# Altium PCB PiRA-RTC-HAT-PCB.PcbDoc
Units mm, origin at the board's own origin, x right, y up, seen from the top; angles counter-clockwise.
Board outline 65 x 30 mm, 2 copper layers (Top Layer, Bottom Layer); 77 components, 59 nets, 308 pads, 91 vias.
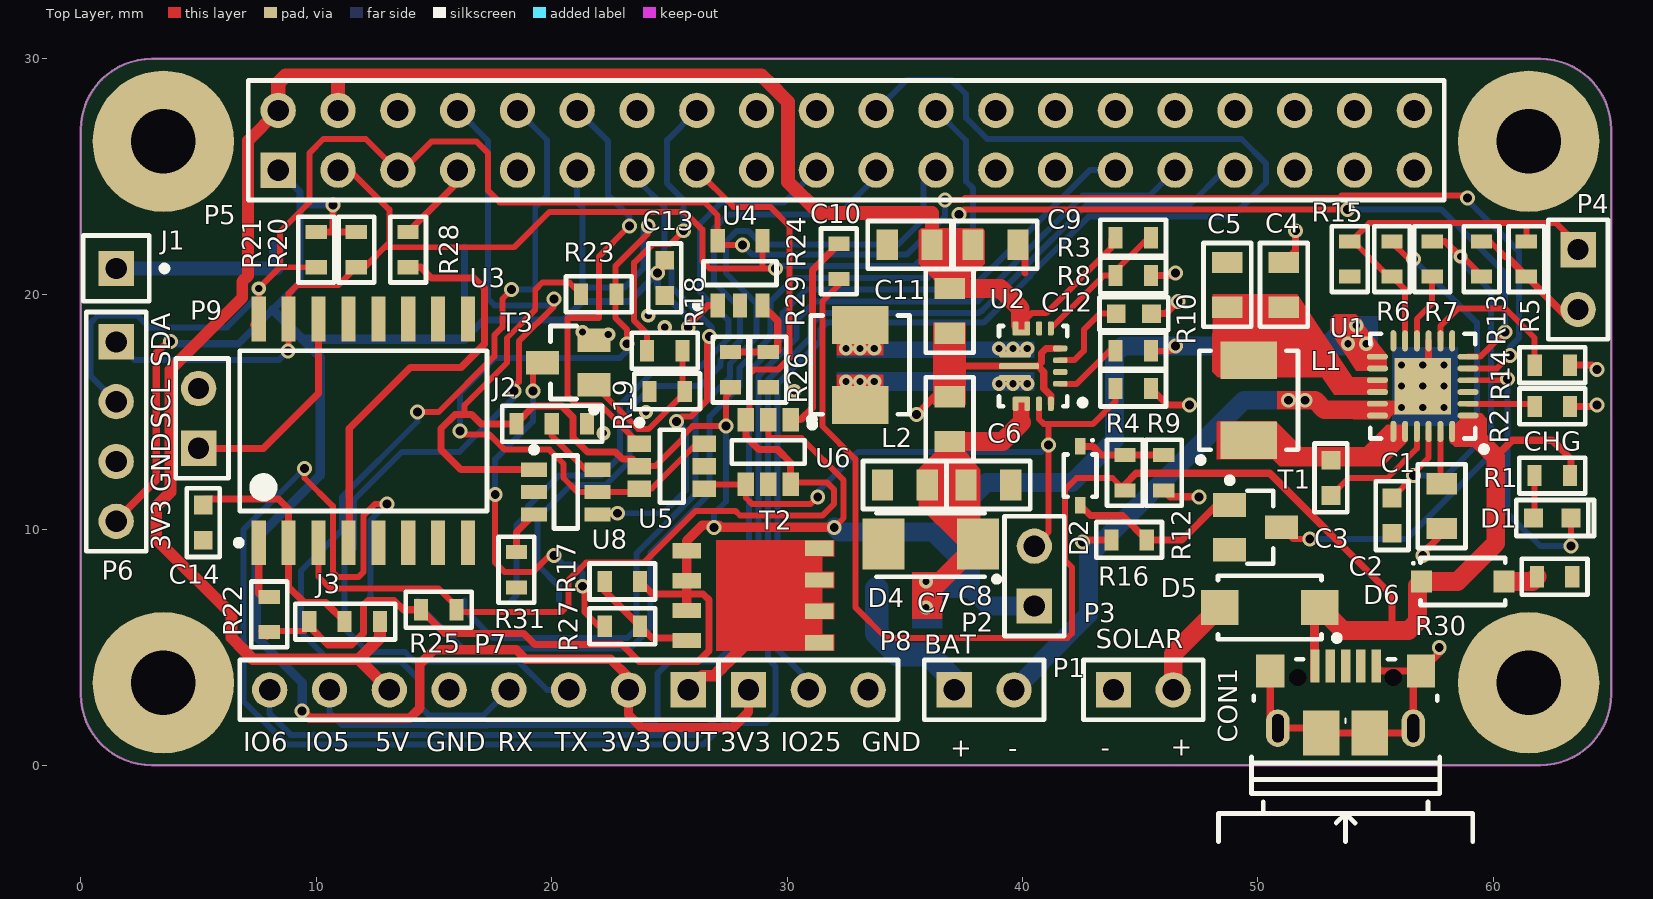
[diagram p0: Top Layer view]
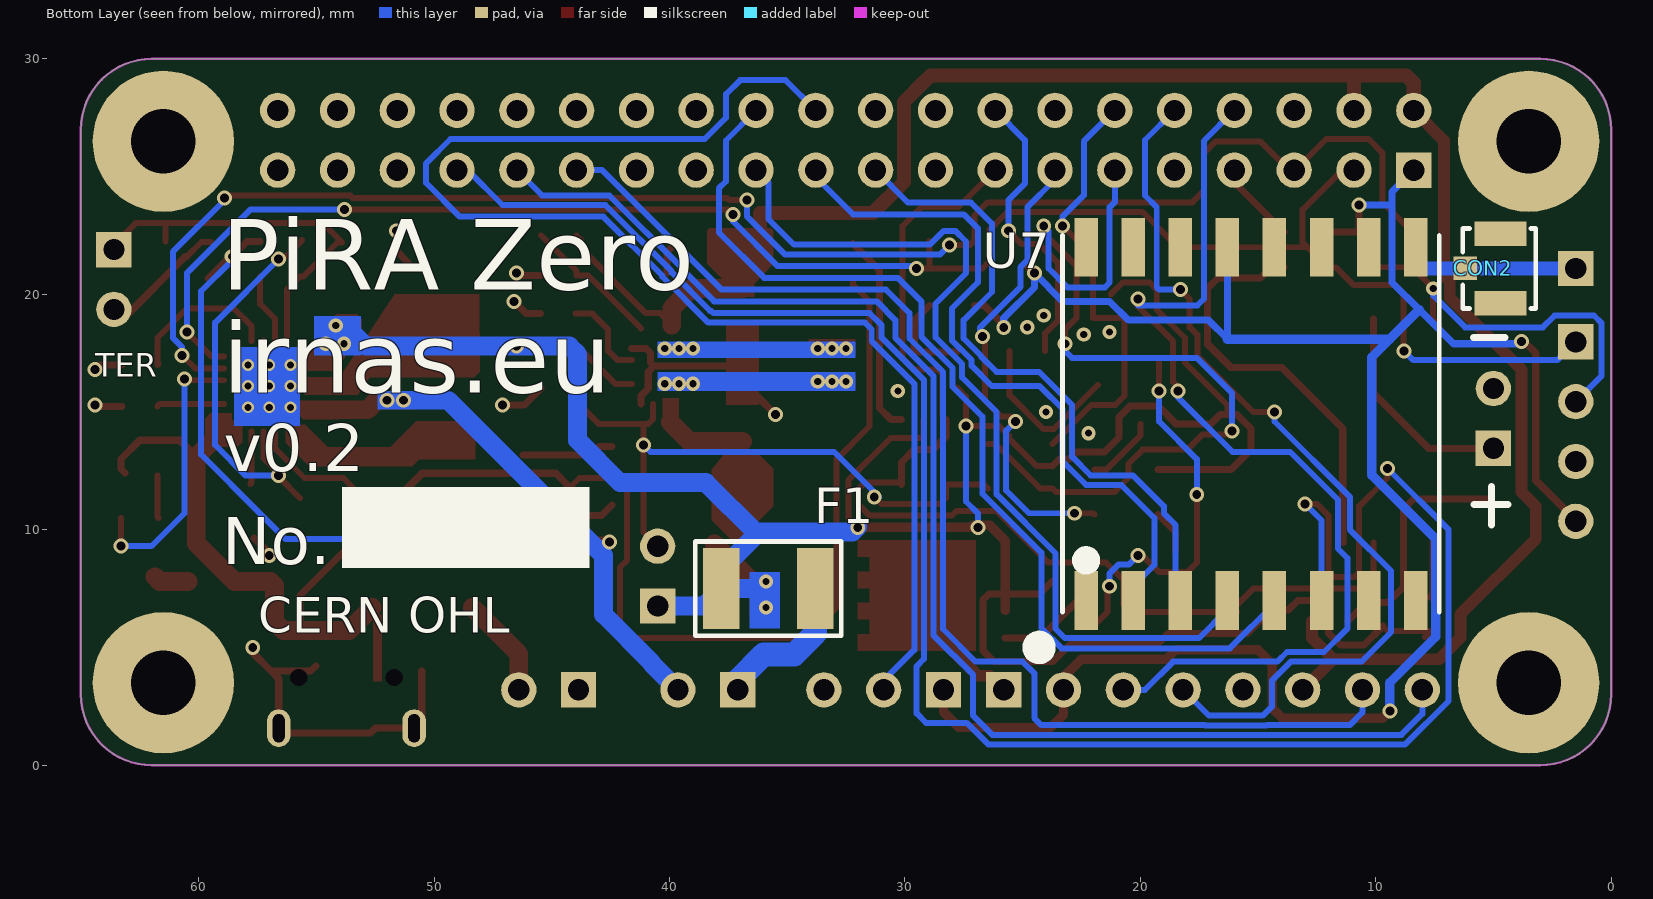
[diagram p1: Bottom Layer view, seen from below]

## Layer stack, top to bottom
Top Solder: solder mask 0.0102, Solder Resist, Dk 3.5
Top Layer: signal copper 0.0356
Dielectric 1: dielectric 0.32, FR-4, Dk 4.8
Bottom Layer: signal copper 0.0356
Bottom Solder: solder mask 0.0102, Solder Resist, Dk 3.5

## Board outline
0,3 0,27 cw(c3,27) 3,30 62,30 cw(c62,27) 65,27 65,3 cw(c62,3) 62,0 3,0 cw(c3,3)

## Design rules (kind name [scope] priority, off if disabled: settings)
Clearance [All] p1: gap=0.152 ignorepadtopadclearanceinfootprint=FALSE except(0: Arc-Hole Track-Hole SMDPad-Hole THPad-Hole Via-Hole Fill-Hole Poly-Hole Region-Hole Text-Hole; 0.03: SMDPad-SMDPad)
ComponentClearance [All] p1: gap=0 collisioncheckmode=3 verticalgap=0 showdistances=TRUE
DiffPairsRouting DiffPairsRouting_ETH [InDifferentialPairClass('ETH_100')] p1: maxlimit=0.213 minlimit=0.195 mostfreqgap=0.203 toplayer_minwidth=0.249 toplayer_maxwidth=0.274 toplayer_prefwidth=0.251 bottomlayer_mingap=0.203 bottomlayer_minwidth=0.249 bottomlayer_maxwidth=0.274 bottomlayer_prefwidth=0.251 maxuncoupledlength=12.7
DiffPairsRouting DiffPairsRouting_USB [InDifferentialPairClass('USB_90')] p2: maxlimit=0.254 minlimit=0.254 mostfreqgap=0.254 toplayer_minwidth=0.322 toplayer_maxwidth=0.347 toplayer_prefwidth=0.33 bottomlayer_minwidth=0.322 bottomlayer_maxwidth=0.347 bottomlayer_prefwidth=0.33 maxuncoupledlength=12.7
DiffPairsRouting [All] p3: maxlimit=0.254 minlimit=0.152 mostfreqgap=0.254 toplayer_minwidth=0.152 toplayer_maxwidth=0.381 toplayer_prefwidth=0.203 bottomlayer_minwidth=0.152 bottomlayer_maxwidth=0.381 bottomlayer_prefwidth=0.203 maxuncoupledlength=12.7
HoleSize [All] p1: absolutevalues=TRUE maxlimit=5 minlimit=0.3 maxpercent=80.000 minpercent=20.000
MatchedLengths camera [InDifferentialPairClass('CAMERA_DIFF')] p1: tolerance=0.254 checknetsindiffpair=TRUE checkdiffpairvsdiffpair=FALSE checkxsignals=FALSE checkothers=FALSE
MinimumSolderMaskSliver [All] p1: minsoldermaskwidth=0.05
PlaneConnect [All] p1: planeconnectstyle=Direct reliefexpansion=0.508 reliefentries=2 reliefconductorwidth=0.254 reliefairgap=0.254
PolygonConnect [All] p1: connectstyle=Direct reliefconductorwidth=0.254 reliefentries=4 polygonreliefangle="90 Angle" airgapwidth=0.254
RoutingVias [All] p1: holewidth=0.38 width=0.635 viastyle="Through Hole" minholewidth=0.3 minwidth=0.508 maxholewidth=0.711 maxwidth=1.27
SilkToSolderMaskClearance [IsPad] p1: minsilkscreentomaskgap=0 clearancetoexposedcopper=TRUE
SolderMaskExpansion [All] p1: expansion=0.102
Width [All] p1: maxlimit=2 minlimit=0.152 preferedwidth=0.203 minimp=50.000000 maximp=50.000000 favimp=50.000000
24 further rules are at their usual default settings.

## Components (designator, comment, footprint, x,y, rotation, side; value= is the part's Value field where it differs from the comment)
C1 "10uF /16V" CAP0805 57.8,11 r270 top
C2 "4u7/16V" CAP0603 55.7,10.6 r270 top
C3 "47n" CAP0603 53.1,12.2 r270 top
C4 "10uF /16V" CAP0805 51.1,20.4 r90 top
C5 "10uF /16V" CAP0805 48.7,20.4 r90 top
C6 "10uF /16V" CAP0805 36.9,14.7 r270 top
C7 "22u" CAP0805 35,11.9 r0 top
C8 "22u" CAP0805 38.55,11.9 r180 top
C9 "22u" CAP0805 38.85,22.1 r180 top
C10 "22u" CAP0805 35.2,22.1 r0 top
C11 "10uF /16V" CAP0805 36.9,19.3 r90 top
C12 "100nF" CAP0603 44.731,19.178 r180 top
C13 "100nF" CAP0603 24.8,20.7 r270 top
C14 "100nF" CAP0603 5.2,10.3 r270 top
CON1 "microUSB" microUSB-CHINA 53.721,2.794 r0 top
CON2 "U.FL-R-SMT-1(10)" "UFL SMD CONNECTOR" 4.7,21.1 r90 bottom
D1 "LED RED" LED0603 62.5,10.5 r180 top
D2 "3V" "SOD-323 2L" 42.445,12.295 r270 top
D4 "RS1J-E3/61T.." SMC/DO-214AC 36.1,9.4 r180 top
D5 "SE30AFG-M3/6A" SODFL127P600-8N 50.5,6.7 r180 top
D6 "BZT52C6V2" SOD123 58.7,7.8 r0 top
F1 "3A" CHIP2PINSM127P600-8N 35.8,7.5 r180 bottom
J1 "Socket" PIN1 1.5,21.1 r270 top
J2 "solder_jumper" "SOLDER JUMPER" 20,14.5 r180 top
J3 "solder_jumper" "SOLDER JUMPER" 11.2,6.1 r180 top
L1 "1.5uH" FDSD0402 49.6,15.5 r180 top
L2 "1.5uH" FDSD0402 33.1,17 r180 top
P1 "Header 2" HDR1X2 37.1,3.2 r0 top
P2 "Header 2" HDR1X2 40.5,6.76 r90 top
P3 "Header 2" HDR1X2 43.86,3.2 r0 top
P4 "Header 2" HDR1X2 63.6,21.9 r270 top
P5 "Header 20X2" HDR2X20 8.382,25.273 r0 top locked
P6 "Header 4" HDR1X4 1.5,17.98 r270 top
P7 "Header 8" HDR1X8 25.8,3.2 r180 top
P8 "Header 3" HDR1X3 28.36,3.2 r0 top
P9 "Header 2" HDR1X2 5,13.46 r90 top
R1 "470R" RES0603 62.5,12.3 r180 top
R2 "0R" RES0603 62.506,15.24 r180 top
R3 "0R" RES0603 44.7,22.4 r180 top
R4 "3k9" RES0603 44.35,12.422 r270 top
R5 "10k" RES0603 61.4,21.5 r90 top
R6 "5k6" RES0603 55.7,21.5 r90 top
R7 "220R" RES0603 57.4,21.5 r270 top
R8 "150k" RES0603 44.7,20.8 r180 top
R9 "470k" RES0603 44.7,16 r180 top
R10 "10k" RES0603 44.7,17.6 r180 top
R12 "10k" RES0603 46.001,12.422 r90 top
R13 "470R" RES0603 59.5,21.5 r270 top
R14 "0R" RES0603 62.506,16.991 r180 top
R15 "33k" RES0603 53.9,21.5 r90 top
R16 "10k" RES0603 44.523,9.566 r0 top
R17 "100k" RES0603 23,7.8 r0 top
R18 "100R" RES0603 24.8,17.6 r180 top
R19 "100k" RES0603 24.9,15.875 r0 top
R20 "10k" RES0603 11.7,21.9 r90 top
R21 "10k" RES0603 10,21.9 r90 top
R22 "10k" RES0603 8,6.4 r270 top
R23 "47k" RES0603 22,20 r180 top
R24 "0R" RES0603 32.2,21.4 r270 top
R25 "47k" RES0603 15.2,6.6 r180 top
R26 "499k" RES0603 27.6,16.8 r270 top
R27 "100R" RES0603 23,5.9 r180 top
R28 "0R" RES0603 13.9,21.9 r90 top
R29 "499k" RES0603 29.2,16.8 r90 top
R30 "10R" RES0603 62.6,8 r180 top
R31 "10k" RES0603 18.5,8.3 r270 top
T1 "MMBT3904" SOT23127P600-8N 49.9,10.1 r0 top
T2 "BSZ120P03NS3GATMA1" PG-TSDSON-8 27.9,7.4 r0 top
T3 "2N7002,215" SOT23127P600-8N 20.7,17.1 r180 top
U1 "BQ24296RGET" QFN4X4 57,16.1 r0 top locked
U2 "TPS630701RNMT" ? 40.638,16.95 r90 top
U3 "DS3231M" SOIC127P1030X265-16N 12,14.2 r90 top
U4 "MCP3021" "SOT23127P600-8N - DUPLICATE" 28,20.9 r90 top
U5 "DMG6602SVT" TSOT26 25.1,12.7 r0 top
U6 "DMG6602SVT" TSOT26 29.2,13.3 r270 top
U7 "Lora RFM95" LORA_MODULE1 7.3,6.5 r90 bottom locked
U8 "TPL5110" SOT236 20.6,11.6 r0 top

## Footprints (in the part's own frame and the unit in brackets; to place one, negate y for a bottom-side part, rotate by r counter-clockwise, add the part's x,y. Pads: shape width x height; smd on the part's side, far side on the other; paste and mask are expansions set on the pad)
CAP0603 [mm]
  rect 0.8x0.8 smd: 1(-0.75,0) 2(0.75,0)
  silkscreen extent -1.46,-0.7 1.46,0.7, body extent -0.8,-0.4 0.8,0.4, height 0.9
CAP0805 [mm]
  rect 0.9x1.3 smd: 1(-0.95,0) 2(0.95,0)
  silkscreen extent -1.78,-1.02 1.78,1.02, body extent -1,-0.6 1,0.6, height 1.5
CHIP2PINSM127P600-8N [mm]
  rect 1.55x3.45 smd: 1(-2,0) 2(2,0)
  silkscreen extent -3.1,-2 3.1,2, body extent -2.41,-1.71 2.41,1.71, height 1.94
FDSD0402 [mm]
  rect 2.4x1.6 smd: 1(0,1.7) 2(0,-1.7)
  silkscreen extent -2.1,-2.1 2.16,2.66, body extent -2.1,-2.2 2.1,2.2, height 2.1
HDR1X2 [mm] "Connector; Header; 2 Position"
  rect 1.5x1.5 hole 0.9: 1(0,0)
  round 1.5 hole 0.9: 2(2.54,0)
  silkscreen extent -1.27,-1.27 3.81,1.27
HDR1X3 [mm] "Connector; Header; 3 Position"
  rect 1.5x1.5 hole 0.9: 1(0,0)
  round 1.5 hole 0.9: 2(2.54,0) 3(5.08,0)
  silkscreen extent -1.27,-1.27 6.35,1.27
HDR1X4 [mm] "Connector; Header; 4 Position"
  rect 1.5x1.5 hole 0.9: 1(0,0)
  round 1.5 hole 0.9: 2(2.54,0) 3(5.08,0) 4(7.62,0)
  silkscreen extent -1.27,-1.27 8.89,1.27
HDR1X8 [mm] "Connector; Header; 8 Position"
  rect 1.5x1.5 hole 0.9: 1(0,0)
  round 1.5 hole 0.9: 2(2.54,0) 3(5.08,0) 4(7.62,0) 5(10.16,0) 6(12.7,0) 7(15.24,0) 8(17.78,0)
  silkscreen extent -1.27,-1.27 19.05,1.27
HDR2X20 [mm] "Connector; Header; 20x2 Position"
  rect 1.5x1.5 hole 0.9: 1(0,0)
  round 1.5 hole 0.9: 2(0,2.54) 3(2.54,0) 4(2.54,2.54) 5(5.08,0) 6(5.08,2.54) 7(7.62,0) 8(7.62,2.54) 9(10.16,0) 10(10.16,2.54) 11(12.7,0) 12(12.7,2.54) 13(15.24,0) 14(15.24,2.54) 15(17.78,0) 16(17.78,2.54) 17(20.32,0) 18(20.32,2.54) 19(22.86,0) 20(22.86,2.54) 21(25.4,0) 22(25.4,2.54) 23(27.94,0) 24(27.94,2.54) 25(30.48,0) 26(30.48,2.54) 27(33.02,0) 28(33.02,2.54) 29(35.56,0) 30(35.56,2.54) 31(38.1,0) 32(38.1,2.54) 33(40.64,0) 34(40.64,2.54) 35(43.18,0) 36(43.18,2.54) 37(45.72,0) 38(45.72,2.54) 39(48.26,0) 40(48.26,2.54)
  silkscreen extent -1.27,-1.27 49.53,3.81
LED0603 [mm]
  rect 0.8x0.8 smd: 1(-0.8,0) 2(0.8,0)
  silkscreen extent -1.78,-0.76 1.52,0.76, body extent -0.85,-0.4 0.85,0.4, height 0.66
LORA_MODULE1 [mm]
  rect 2.5x1 smd: 1(0.5,15) 2(0.5,13) 3(0.5,11) 4(0.5,9) 5(0.5,7) 6(0.5,5) 7(0.5,3) 8(0.5,1) 9(15.5,1) 10(15.5,3) 11(15.5,5) 12(15.5,7) 13(15.5,9) 14(15.5,11) 15(15.5,13) 16(15.5,15)
  silkscreen extent -1.86,0 16,17.36, body extent 0,0.1 16,16, height 2.23
microUSB-CHINA [mm]
  rect 0.4x1.4 smd mask+0.05: 1(-1.3,1.425) 2(-0.65,1.425) 3(0,1.425) 4(0.65,1.425) 5(1.3,1.425)
  rect 1.2x1.4 smd: 6(-3.2,1.2) 7(3.2,1.2)
  oval 1x1.6 hole 0.5 slot 1.2 at 90 deg: 8(-2.875,-1.225) 9(2.875,-1.225)
  rect 1.55x1.9 smd paste-10: 10(-1.025,-1.425) 11(1.025,-1.425)
  silkscreen extent -5.4,-6.05 5.4,1.7, body extent -4.04,-3.83 4.04,1.73, height 2.77
PG-TSDSON-8 [mm]
  rect 1.2x0.65 smd: 1(-2.159,-0.832) 1(-2.159,0.438) 1(-2.159,1.708) 2(-2.159,-2.102) 3(3.46,-2.203) 3(3.46,-0.857) 3(3.46,0.464) 3(3.46,1.81)
  round 0.6 on Top Overlay: ""(-3.459,2.203)
  Top Layer region: 3.591,2.153 -0.909,2.153 -0.909,-2.547 3.591,-2.547
  Top Layer region: 3.591,2.153 3.591,1.453 4.091,1.453 4.091,2.153
  Top Layer region: 3.591,-1.847 3.591,-2.547 4.091,-2.547 4.091,-1.847
  Top Layer region: 3.591,0.818 3.591,0.118 4.091,0.118 4.091,0.818
  Top Layer region: 3.591,-0.512 3.591,-1.212 4.091,-1.212 4.091,-0.512
  body extent -2.48,-2.77 3.87,2.38, height 1.1
PIN1 [mm] "Connector; Plug"
  rect 1.5x1.5 hole 0.9: 1(0,0)
  silkscreen extent -1.4,-1.4 1.4,2.18
QFN4X4 [mm] "Name Type Description Vault Item Revision Revision Status    QFN4x4 Footprint QFN, 24-Leads, Body 4,00x4,00mm, Pitch 0,50mm, Thermal Pad 2,60x2,60mm, IPC Medium Density"
  oval 0.9x0.25 smd: 1(1.925,-1.25) 2(1.925,-0.75) 3(1.925,-0.25) 4(1.925,0.25) 5(1.925,0.75) 6(1.925,1.25) 13(-1.925,1.25) 14(-1.925,0.75) 15(-1.925,0.25) 16(-1.925,-0.25) 17(-1.925,-0.75) 18(-1.925,-1.25)
  oval 0.25x0.9 smd: 7(1.25,1.925) 8(0.75,1.925) 9(0.25,1.925) 10(-0.25,1.925) 11(-0.75,1.925) 12(-1.25,1.925) 19(-1.25,-1.925) 20(-0.75,-1.925) 21(-0.25,-1.925) 22(0.25,-1.925) 23(0.75,-1.925) 24(1.25,-1.925)
  rect 2.4x2.4 smd: 25(0,0)
  silkscreen extent -2.22,-2.8 2.73,2.22, body extent -2.09,-2.09 2.08,2.08, height 1
RES0603 [mm]
  rect 0.6x0.9 smd: 1(-0.75,0) 2(0.75,0)
  silkscreen extent -1.4,-0.76 1.4,0.76, body extent -0.8,-0.42 0.8,0.42, height 0.8
SMC/DO-214AC [mm]
  rect 1.78x2.16 smd: 1(-2,0) 2(2,0)
  silkscreen extent -2.91,-1.3 2.3,1.61, body extent -2.5,-1.35 2.5,1.35, height 2.21
SOD123 [mm] "SODFL, 2-Leads, Body 1.55x3.70mm, IPC Medium Density"
  rect 0.9x0.95 smd: 1(-1.75,0) 2(1.75,0)
  silkscreen extent -2.15,-1 1.8,1, body extent -1.85,-0.8 1.85,0.8, height 1.27
"SOD-323 2L" [mm]
  rect 0.7x0.45 smd: 1(-1.25,0) 2(1.25,0)
  silkscreen extent -1.55,-0.7 0.9,0.7, body extent -1.1,-0.67 1.1,0.68, height 1.1
SODFL127P600-8N [mm]
  rect 1.6x1.5 smd: 1(-2.125,0) 2(2.125,0)
  silkscreen extent -2.98,-1.35 2.2,1.42, body extent -2.6,-1.35 2.6,1.35, height 1
SOIC127P1030X265-16N [mm] "SOIC, 16-Leads, Body 10.30x7.50mm, Pitch 1.27mm, IPC Medium Density"
  rect 1.9x0.6 smd: 1(-4.75,4.445) 2(-4.75,3.175) 3(-4.75,1.905) 4(-4.75,0.635) 5(-4.75,-0.635) 6(-4.75,-1.905) 7(-4.75,-3.175) 8(-4.75,-4.445) 9(4.75,-4.445) 10(4.75,-3.175) 11(4.75,-1.905) 12(4.75,-0.635) 13(4.75,0.635) 14(4.75,1.905) 15(4.75,3.175) 16(4.75,4.445)
  silkscreen extent -4.87,-5.25 3.4,5.42, body extent -5.16,-5.25 5.16,5.25, height 2.65
"SOLDER JUMPER" [mm]
  rect 0.6x0.9 smd: 1(-1.5,0) 2(1.5,0) 3(0,0)
  silkscreen extent -2.15,-0.76 2.1,0.76, body extent -1.55,-0.42 0.05,0.42, height 0.8
SOT236 [mm]
  rect 1.1x0.6 smd: 1(-1.35,0.95) 2(-1.35,0) 3(-1.35,-0.95) 4(1.35,-0.95) 5(1.35,0) 6(1.35,0.95)
  silkscreen extent -1.47,-1.55 0.5,1.92, body extent -1.5,-1.55 1.5,1.55, height 1
SOT23127P600-8N [mm]
  rect 1.4x1 smd: 1(-1.1,0.95) 2(-1.1,-0.95) 3(1.1,0)
  silkscreen extent -1.22,-1.55 0.75,2.12, body extent -1.35,-1.56 1.35,1.56, height 1.2
"SOT23127P600-8N - DUPLICATE" [mm]
  rect 1x0.6 smd: 1(-1.375,0.95) 2(-1.375,0) 3(-1.375,-0.95) 4(1.375,-0.95) 5(1.375,0.95)
  silkscreen extent -1.5,-1.55 0.5,1.92, body extent -1.5,-1.55 1.5,1.55, height 1.45
TSOT26 [mm]
  rect 1x0.7 smd: 1(-1.375,0.95) 2(-1.375,0) 3(-1.375,-0.95) 4(1.375,-0.95) 5(1.375,0) 6(1.375,0.95)
  silkscreen extent -1.5,-1.55 0.5,1.97, body extent -1.5,-1.55 1.5,1.55, height 1
"UFL SMD CONNECTOR" [mm] "uFL SMD connector"
  rect 1x1 smd: 1(0,1.5)
  rect 1.05x2.2 smd: 2(-1.475,0) 2(1.475,0)
  silkscreen extent -1.7,-1.5 1.7,1.6, body extent -1.7,-1.55 1.7,1.55, height 1.25
? [mm]
  rrect50% 0.25x0.6 smd: 1(-0.75,-0.962) 2(-0.25,-0.962) 3(0.25,-0.962) 4(0.75,-0.962)
  rrect50% 0.6x0.25 smd: 5(1.6,-0.562) 6(1.6,-0.062) 7(1.6,0.438) 8(1.6,0.938) 12(-1.6,0.938) 13(-1.6,0.438) 14(-1.6,-0.062) 15(-1.6,-0.562)
  rrect50% 0.25x0.7 smd: 7(1.425,0.688) 13(-1.425,0.688)
  rrect50% 0.25x1.35 smd: 9(0.5,0.963) 11(-0.5,0.963)
  rrect50% 0.25x1.7 smd: 10(0,0.788)
  silkscreen extent -1.7,-2.04 1.7,1.64, body extent -1.56,-1.12 1.56,1.5, height 1

## Part data
C1 C4 C5 C6 C11: "TDK - CGA4J1X5R1C106K125AC - CAP, MLCC, X5R, 10UF, 16V, 0805"
C2: library part "4u7  16V 0603", "MURATA - GRM188R61C475KAAJD - CAP, MLCC, X5R, 4.7UF, 16V, 0603"
C3: library part "47nF / 50V", "MULTICOMP - MC0603B473K500CT - CAP, MLCC, X7R, 47NF, 50V, 0603"
C7 C8 C9 C10: library part "22u 6.3V 0805", "MULTICOMP - MC0805X226M6R3CT - CAP, MLCC, X5R, 22UF, 0805"
C12 C13 C14: "MURATA - GRM188R71C104KA01J - CAP, MLCC, X7R, 0.1UF, 16V, 0603"
CON1: library part "Micro USB CHINA 1"
CON2: "HIROSE(HRS) - U.FL-R-SMT-1(10) - RF COAXIAL, U.FL, STRAIGHT JACK, 50OHM"
D1: "BROADCOM LIMITED - HSMS-C190 - LED, RED, 10MCD, 626NM"
D2: library part MM3Z3V0T1G, "ON SEMICONDUCTOR - MM3Z3V0T1G - ZENER DIODE, 200MW, 3V, SOD-323"
D4: "VISHAY - RS1J-E3/61T.. - DIODE, FAST, 1A, 600V, SMD"
D5: "VISHAY - SE30AFG-M3/6A - RECTIFIER, ESD, 400V, 3A, DO-221AC"
D6: "DIODES INC. - BZT52C6V2 - DIODE, ZENER, 6.2V, 0.5W, SOD-123"
F1: library part "PTC FUSE 3A", "LITTELFUSE - MINISMDC150F/24-2 - POLYSWITCH, SMD, 1812, 1.5A"
L1 L2: library part "1.5uH 5.1A", "MURATA - FDSD0420-H-1R5M=P3 - INDUCTOR, SHIELDED, 1.5UH, 5.1A, 20%"
P1 P2 P3 P4 P9: "Header, 2-Pin"
P5: "Header, 20-Pin, Dual row"
P6: "Header, 4-Pin"
P7: "Header, 8-Pin"
P8: "Header, 3-Pin"
R1 R13: "MULTICOMP - MCMR06X471 JTL - RES, CERAMIC, 470R, 5%, 0.1W, 0603"
R2 R3 R14 R24 R28: "BOURNS - CR0603-J/-000ELF - RES, THICK FILM, 0R, 5%, 0.1W, 0603"
R4: "MULTICOMP - MCWR06X3901FTL - RES, THICK FILM, 3K9, 1%, 0.1W, 0603"
R5 R10 R12 R16 R20 R21 R22 R31: "MULTICOMP - MCMR06X103 JTL - RES, CERAMIC, 10K, 5%, 0.1W, 0603"
R6: "MULTICOMP - MCMR06X5601FTL - RES, CERAMIC, 5K6, 1%, 0.1W, 0603"
R7: "MULTICOMP - MCWR06X2200FTL - RES, THICK FILM, 220R, 1%, 0.1W, 0603"
R8: "MULTICOMP - MCWR06X1503FTL - RES, THICK FILM, 150KOHM, 1%, 0.1W"
R9: "MULTICOMP - MCWR06X4703FTL - RES, THICK FILM, 470K, 1%, 0.1W, 0603"
R15: "MULTICOMP - MCWR06X3302FTL - RES, THICK FILM, 33K, 1%, 0.1W, 0603"
R17 R19: "MULTICOMP - MCMR06X104 JTL - RES, CERAMIC, 100K, 5%, 0.1W, 0603"
R18 R27: "MULTICOMP - MC0063W06031100R - RES, THICK FILM, 100R, 1%, 0.063W, 0603"
R23 R25: "MULTICOMP - MCMR06X4702FTL - RES, CERAMIC, 47K, 1%, 0.1W, 0603"
R26 R29: "MULTICOMP - MC0063W06031499K - RES, THICK FILM, 499K, 1%, 0.063W, 0603"
R30: "VISHAY - RCA060310R0FKEA - RES, AUTO, THICK FILM, 10R, 1%, 0603"
T1: "ON SEMICONDUCTOR/FAIRCHILD - MMBT3904 - TRANSISTOR, NPN, SOT-23"
T2: "INFINEON - BSZ120P03NS3GATMA1 - MOSFET, P-CH, -30V, -40A, PG-TSDSON-8"
T3: "NEXPERIA - 2N7002,215 - MOSFET,N CH, 60V,0.3A,SOT23"
U1: "IC LI+ CHARGER PWR MGMT 24VQFN"
U2: "TEXAS INSTRUMENTS - TPS630701RNMT - DC/DC CONV, BUCK-BOOST, 2.4MHZ, VQFN-15"
U3: library part DS3231M+TRL, "MAXIM INTEGRATED PRODUCTS - DS3231M+TRL - RTC, I2C, WSOIC-16"
U4: library part MCP3021A5T-E/OT, "MICROCHIP - MCP3021A5T-E/OT - 10BIT ADC, I2C, 1CH, SMD, SOT-23A-5"
U5 U6: "DIODES INC. - DMG6602SVT - MOSFET, NP CH, , 30V, 3.4, ATSOT23"
U7: library part "Lora RFM95 868M", "RFM95 ULTRA-LONG RANGE TRANSCEIV"
U8: library part TPL5110DDCT, "TEXAS INSTRUMENTS - TPL5110DDCT - NANO TIMER, SINGLE, 5.5V, SOT-23-6"

## Free pads (board coordinates)
  round 6 hole 2.75: 0(3.5,3.5) 0(3.5,26.5) 0(61.5,3.5) 0(61.5,26.5)
  rect 0x0 hole 0.73 unplated: ""(51.693,3.719) ""(55.743,3.719)

## Via types
v1: diameter 0.635, hole 0.38, Top Layer to Bottom Layer, tented both sides, 56 vias
v2: diameter 0.6, hole 0.3, Top Layer to Bottom Layer, tented both sides, 26 vias
v3: diameter 0.5, hole 0.3, Top Layer to Bottom Layer, tented both sides, 9 vias

## Nets (pads, with @x,y where several pads share a name; then routed paths per layer and width w, separated by ;. In a path a pad name is that pad's centre, name@x,y a point inside that pad or via, vN(x,y) a via of type N, cw(c..) or ccw(c..) an arc to the next point about the centre after c; other vN are vias at no path point)
3.3V: C13.1 P5.1 P6.4 P7.2 P8.1 R20.2 R21.2 U4.1 U7.13 | length 94.9
  Top Layer w0.3: P6.4 1.5,10.4 3.2,12.1 3.2,17.5 3.8,18.1 v1(3.8,18) ; R21.2 10.7,22.65 ; v1(10.7,23.8) 10.7,22.65 ; R20.2 10.7,22.65 ; v1(24.5,20.9) 24.8,21.2 C13.1 ; v1(25.8,18.6) 25.8,18.7 26.625,19.525 U4.1
  Top Layer w0.4: v1(9.4,2.3) 9.7,2 13.967,2 14.4,2.433 14.4,4.3 15,4.9 18.49,4.9 18.889,4.5 22.5,4.5 23.26,3.74 P7.2 23.26,2.14 23.8,1.6 27.7,1.6 28.36,2.26 P8.1
  Bottom Layer w0.3: v1(3.8,18) 3.9,17.9 6.7,17.9 8.15,19.35 9.3,20.5 9.3,24.355 P5.1 ; 9.3,23.8 v1(10.7,23.8) ; U7.13 16.3,18.1 17.1,18.9 20.5,18.9 21.3,19.7 23.3,19.7 v1(24.5,20.9) 24.5,20.288 25.8,18.988 v1(25.8,18.6)
  Bottom Layer w0.4: 8.15,19.35 9.4,18.1 ; v1(9.4,2.3) 9.4,3.5 7.448,5.452 7.448,9.6 10.17,12.323 10.17,17.33 9.4,18.1 ; 16.3,18.1 9.4,18.1
+5V: C9.2 C10.2 C11.2 J3.1 P5.2 P5.4 P7.6 R3.2 U2.7 U2.8 | length 82.3
  Top Layer w0.254: 39.9,18.7 40.4,19.2 41,19.2 43.75,21.95 43.75,22.3 R3.2@43.95,22.5
  Top Layer w0.5: P5.2 7.1,26.531 7.1,20.793 6.853,20.546 6.853,19.853 3.8,16.8 3.8,11.6 3.2,11 3.2,9.6 6.4,6.4 6.4,5.412 6.902,4.909 6.902,4.9 7.302,4.5 11.8,4.5 ; J3.1 12.7,5.4 11.8,4.5 ; P7.6 11.8,4.5
  Top Layer w0.6: P5.2 8.382,28.982 8.7,29.3 11,29.3 ; P5.4 10.922,29.222 11,29.3 ; C10.2 36.15,23.45 31.365,23.45 30.04,24.775 30.04,28.176 29.2,29.015 29.185,29.015 28.9,29.3 11,29.3 ; C10.2@36.6,21.5 C10.2@36.6,22.1
  Top Layer w0.8: C11.2 39.05,20.25 39.9,19.4 39.9,18.7
ANTENA: CON2.1 J1.1 U7.9 | length 7.7
  Bottom Layer w0.6: J1.1 CON2.1 8.3,21.1 U7.9
CPU_SELF_EN_5V: P5.12 U5.1 | length 18.8
  Top Layer w0.254: v1(23.3,22.9) 22,21.6 22,19 20.671,19 20.671,15.684 21.055,15.3 22.075,15.3 U5.1
  Bottom Layer w0.254: P5.12 22.4,26.495 22.4,24.209 23.3,23.309 v1(23.3,22.9)
ENABLE_5V: P2.2 R9.2 U2.14 U5.4 U6.4 | length 27.2
  Top Layer w0.254: U5.4 26.65,11.925 U6.4 28.25,11.35 28.5,11.1 31,11.1 v1(31.3,11.4) ; P2.2 41.1,9.9 v1(41.1,13.6) 41.1,14.5 ; U2.14 40.7,14.7 40.9,14.5 41.1,14.5 ; R9.2 43.95,15.45 43,14.5 41.1,14.5
  Bottom Layer w0.254: v1(31.3,11.4) 31.1,11.4 33,13.3 40.8,13.3 v1(41.1,13.6)
FET_OUT: P7.1 T2.3 | length 5.5
  Top Layer w0.5: P7.1 26.4,3.8 26.9,3.8 27.208,4.108 27.208,4.117 27.443,4.352 27.452,4.352 28.8,5.7 28.8,7.2
GND: C1.2 C2.2 C4.2 C5.2 C6.1 C7.1 C8.1 C9.1 C10.1 C11.1 C12.1 C13.2 C14.2 CON1.5 CON1.6 CON1.7 CON1.8 CON1.9 CON1.10 CON1.11 CON2.2 D4.2 J2.1 P1.2 P3.1 P4.2 P5.6 P5.9 P5.14 P5.20 P5.25 P5.30 P5.34 P5.39 P6.3 P7.5 P8.3 P9.2 pad. R2.1 R5.1 R8.1 R9.1 R12.1 R13.1 R14.1 R15.1 R16.1 R19.1 R29.1 R30.1 R31.2 T1.2 T3.2 U1.9 U1.17 U1.18 U1.25 U2.4 U2.10 U2.15 U3.13 U4.2 U5.5 U6.5 U7.1 U7.8 U7.10 U8.2 | length 65
  Top Layer w0.254: R13.1@59.475,22.225 59.875,22.225 60.5,21.6
  Top Layer w0.3: v1(35.5,14.9) 36.25,15.65 C6.1 ; 36.9,17 36.95,16.95 U2.10 U2.10@40.65,16.95 ; C9.1 40.1,21.8 40.1,20.9 ; U2.15 41.2,15.7 40.9,16 40.9,16.7 U2.10@40.65,16.95 ; U2.4 41,17.7 40.802,17.502 40.802,17.45 40.8,17.448 40.8,17.1 U2.10@40.65,16.95 ; v1(42.55,9.475) 42.641,9.566 R16.1 ; R9.1 46.15,15.3 v1(47.1,15.3) ; R8.1 46.4,20.8 v1(46.5,20.9) ; C12.1 46.078,19.178 v1(46.6,19.7) ; R12.1 46.273,11.4 v1(47.5,11.4) ; CON1.6 50.521,1.894 CON1.8 52.496,1.569 CON1.10 CON1.11 56.396,1.369 CON1.9 56.596,3.669 CON1.7 ; C4.2 51.6,21.85 v1(51.6,22.7) ; CON1.5 55.246,3.994 CON1.7 ; v1(57,8.9) 57,9 C1.2@57.65,9.65 ; v3(57,16.1) 57.25,16.35 U1.9 ; v1(57.7,5) 57.7,4.773 CON1.7 ; 60.5,21.6 60.569,21.6 P4.2@63.119,19.05 ; R2.1 64.34,15.24 v1(64.4,15.3) ; R14.1 64.209,16.991 v1(64.4,16.8)
  Top Layer w0.8: P1.2 P1.2@39.64,3.34 ; v1(51.3,15.5) 52.425,15.5 52.825,15.1 54.1,15.1
  Bottom Layer w0.8: P1.2 40.75,4.31 40.75,4.35 42.8,6.4 42.8,8.9 49.4,15.5 v1(51.3,15.5)
  other v1: 52,15.5
  other v2: 22.2,14.1 24,15 30.3,15.9 22.4,18.3 21.3,18.4 24.8,18.6 24.1,19.1
  other v3: 56.1,15.2 57,15.2 57.9,15.2 56.1,16.1 57.9,16.1 56.1,17 57,17 57.9,17
GPIO_BCM5: P5.29 P7.7 | length 52.5
  Bottom Layer w0.254: P7.7 10.56,2.24 11.1,1.7 14.625,1.7 14.632,1.694 17.248,1.694 17.255,1.7 24.2,1.7 24.5,2 24.5,3.9 25,4.4 27,4.4 28.381,5.781 28.381,16.705 29.8,18.124 29.8,19.2 30.8,20.2 37.785,20.2 42.858,25.273 P5.29
GPIO_BCM6: P5.31 P7.8 | length 57.7
  Bottom Layer w0.254: P7.8 8.02,2.18 8.913,1.287 26.287,1.287 27.1,2.1 27.1,3.835 28.787,5.522 28.787,16.537 30.4,18.149 30.4,18.9 31.2,19.7 38.103,19.7 39.503,21.1 39.503,21.147 42.556,24.2 45.409,24.2 P5.31
GPIO_BCM25: P5.22 P8.2 | length 58.1
  Bottom Layer w0.254: P8.2 30.9,3.6 29.6,4.9 29.6,16.2 31.406,18.006 31.406,18.506 31.694,18.794 38.346,18.794 40.316,20.764 40.316,20.811 42.805,23.3 48.908,23.3 50.336,24.729 50.336,25.564 49.3,26.6 38.5,26.6 37.6,27.5 37.6,28.5 37,29.1 35.069,29.1 P5.22
GPIO_FET: P5.16 R18.2 | length 12.6
  Top Layer w0.254: R18.2 24.05,18.331 23.5,18.881 23.5,21.345 24.284,22.129 25.029,22.129 v1(25.6,22.7)
  Bottom Layer w0.254: v1(25.6,22.7) 25.6,24 24.9,24.7 24.9,26.551 P5.16
LORA_RST: P5.33 U7.6 | length 87.4
  Top Layer w0.254: v1(9.5,12.6) 9.5,12.2 10.7,11 10.7,8.2 10.9,8 11.8,8 12,8.2 12,10.6 12.5,11.1 v1(13,11.1)
  Bottom Layer w0.254: v1(9.5,12.6) 6.9,10 6.9,2.725 8.744,0.881 26.456,0.881 27.375,1.8 29.1,1.8 29.5,2.2 29.5,4.2 29.194,4.506 29.194,16.368 31,18.175 31,18.7 31.5,19.2 38.131,19.2 38.224,19.294 38.271,19.294 39.91,20.932 39.91,20.979 42.724,23.794 47.094,23.794 48.573,25.273 P5.33 ; U7.6@12.3,7.178 12.3,10.4 v1(13,11.1)
  Bottom Layer w0.3: U7.6 U7.6@12.3,7.178
MISO: P5.21 U7.2 | length 30.3
  Bottom Layer w0.254: U7.2 20.3,7.6 19.4,8.5 19.4,10.5 20.8,11.9 22.3,11.9 23.3,12.9 23.3,15.128 24.272,16.1 26.3,16.1 27.162,16.962 27.162,17.21 28,18.048 28,19.4 26.9,20.5 26.9,22.8 27.5,23.4 32.2,23.4 33.782,24.982 P5.21
MOSI: P5.19 U7.3 | length 28.3
  Bottom Layer w0.254: U7.3 18.5,7.2 18.5,10.2 19,10.7 19,11 20.3,12.3 20.625,12.3 20.632,12.306 22.106,12.306 22.894,13.094 22.894,15.296 24.297,16.7 26.1,16.7 26.755,17.355 26.755,17.378 27.5,18.123 27.5,18.9 26.3,20.1 26.3,23 27.2,23.9 29.869,23.9 P5.19
NetC1_1: C1.1 U1.23 | length 2.2
  Top Layer w0.254: U1.23 57.75,12 C1.1
NetC2_1: C2.1 R6.2 U1.22 | length 17.2
  Top Layer w0.254: R6.2@55.6,22.3 56.4,21.5 v1(56.6,21.5) ; C2.1 56.6,12.25 v1(56.6,12.3) 56.5,12.3 57.25,13.05 U1.22
  Bottom Layer w0.254: v1(56.6,12.3) 58,12.3 59.3,13.6 59.3,18.8 v1(56.6,21.5)
NetC3_1: C3.1 L1.1 U1.19 U1.20
NetC3_2: C3.2 U1.21 | length 5.2
  Top Layer w0.254: C3.2 53.85,12.2 55.5,12.2 56.75,13.45 U1.21
NetC4_1: C4.1 C5.1 L1.2 U1.15 U1.16
NetC12_2: C12.2 U2.3 | length 3.7
  Top Layer w0.254: U2.3 42.2,17.2 42.6,17.6 42.6,18.5 43.278,19.178 C12.2
NetC14_1: C14.1 J3.3 U3.2 | length 10
  Top Layer w0.3: C14.1@5.3,11.3 8.4,11.3 8.825,10.875 U3.2 8.825,7.575 9.5,6.9 10.4,6.9 J3.3
NetD1_1: D1.1 U1.4 | length 11.9
  Top Layer w0.254: U1.4 60.55,16.35 v1(60.6,16.4) ; v1(63.3,9.3) D1.1
  Bottom Layer w0.254: v1(60.6,16.4) 60.6,10.7 62,9.3 v1(63.3,9.3)
NetD1_2: D1.2 R1.2 | length 1.8
  Top Layer w0.254: D1.2 61.75,10.55 R1.2
NetD2_1: D2.1 R4.1 R12.2 | length 3.9
  Top Layer w0.3: D2.1 42.98,13.545 43.353,13.172 R4.1 R12.2 R12.2@46.228,13.172
NetD2_2: D2.2 R16.2 T1.1 | length 7.6
  Top Layer w0.3: D2.2 42.89,10.6 44.239,10.6 R16.2 46.766,9.566 48.25,11.05 T1.1
NetD5_2: D5.2 P3.2 | length 4.3
  Top Layer w0.8: P3.2 46.4,4.725 D5.2
NetD6_2: D6.2 R30.2 | length 1.5
  Top Layer w0.8: D6.2 61.65,7.8 R30.2
NetF1_2: F1.2 P1.1 | length 6.4
  Bottom Layer w1: F1.2 33.8,5.6 34.7,4.7 36,4.7 37.1,3.6 P1.1
NetJ2_3: J2.3 U8.6 | length 3.1
  Top Layer w0.254: J2.3 20,14 21.45,12.55 U8.6
NetL2_1: L2.1 U2.11
  other v2: 39,16.2 39.6,16.2 40.2,16.2 32.5,16.3 33.1,16.3 33.7,16.3
NetL2_2: L2.2 U2.9
  other v2: 32.5,17.7 33.1,17.7 33.7,17.7 39,17.7 39.6,17.7 40.2,17.7
NetP4_1: P4.1 R5.2 R6.1 R15.2 U1.11 | length 16.9
  Top Layer w0.254: U1.11 56.25,20.2 R6.1 55.55,20.75 54.1,22.2 53.9,22.2 54.725,23.025 61.4,23.025 ; R5.2 61.4,23.025 ; P4.1@63.119,21.59 63.119,22.581 62.675,23.025 61.4,23.025
NetP9_1: P9.1 U3.14 | length 9.2
  Top Layer w0.3: P9.1 7.76,13.46 10.095,15.795 U3.14
NetR2_2: R2.2 U1.2 | length 2.9
  Top Layer w0.254: U1.2 61.646,15.35 R2.2
NetR3_1: R3.1 R8.2 U2.5 | length 5.9
  Top Layer w0.254: U2.5 43.45,20.8 R8.2@43.85,20.8 ; R8.2 43.95,21 R3.1@45.45,22.5
NetR7_1: R7.1 R13.2 T1.3 | length 22.4
  Top Layer w0.254: T1.3 51.5,9.6 v1(52.2,9.6) ; v2(58.6,21.6) 58.7,21.6 59.225,21.075 R13.2@59.625,20.675
  Top Layer w0.3: R7.1 57.95,22.25 v2(58.6,21.6)
  Bottom Layer w0.254: v1(52.2,9.6) 56.3,9.6 57.4,10.7 59.9,13.2 59.9,20.134 58.6,21.434 v2(58.6,21.6)
NetR7_2: R7.2 U1.10 | length 3
  Top Layer w0.254: U1.10 56.75,18.95 57.388,19.587 R7.2@57.388,20.762
NetR10_2: R10.2 U2.1 | length 2.9
  Top Layer w0.254: U2.1 42.3,16.2 43.7,17.6 R10.2
NetR14_2: R14.2 U1.8 | length 6.7
  Top Layer w0.254: U1.8 57.75,18.65 58.5,19.4 60.5,19.4 61.756,18.144 R14.2 R14.2@61.703,17.044
NetR17_1: R17.1 R27.1 T2.2 | length 4.7
  Top Layer w0.3: R17.1 22.25,7.4 R27.1 24.252,5.398 T2.2@25.741,5.398
NetR18_1: R18.1 R19.2 T3.1 | length 7
  Top Layer w0.254: T3.1 23.67,14.279 24.12,14.279 25.55,15.709 25.55,15.8 25.55,16.6 R18.1
NetR22_1: R22.1 U3.1 | length 2.4
  Top Layer w0.3: U3.1 7.555,7.295 R22.1@7.7,7.15
NetR24_1: R24.1 U6.1 | length 8.6
  Top Layer w0.3: U6.1 30.575,14.675 31.071,15.171 31.071,21.021 R24.1
NetR26_1: R26.1 R29.2 U4.3 | length 4
  Top Layer w0.3: R26.1@27.8,17.55 29.55,17.55 29.6,17.6 29.6,18.875 U4.3
NetR27_2: R27.2 T3.3 | length 16.4
  Top Layer w0.254: v1(17.6,11.5) 17.6,8.6 18,8.2 19.2,8.2 19.9,8.9 v1(20.1,8.9) ; v1(19.2,15.9) T3.3@19.2,17.1 ; v1@21.4,7.6 21.4,6.5 22,5.9 R27.2
  Bottom Layer w0.254: v1(17.6,11.5) 17.6,13 19.2,14.6 v1(19.2,15.9) ; v1(20.1,8.9) 20.471,8.529 20.916,8.529 21.3,8.145 v1(21.3,7.6)
NetR28_1: R28.1 U3.4 | length 18.1
  Top Layer w0.3: U3.4 11.4,9.485 11.4,14.3 14,16.9 16.158,16.9 17.135,17.877 17.135,20.265 16.7,20.7 14.9,20.7 14.45,21.15 R28.1
NetR31_1: R31.1 U8.3 | length 1.9
  Top Layer w0.3: R31.1 18.5,9.9 U8.3
RST_RTC: P5.7 R28.2 | length 3.5
  Top Layer w0.3: R28.2 16.002,24.752 P5.7
RTC_EN_5V: P5.15 R25.1 U3.3 U6.3 U6.6 | length 48.1
  Top Layer w0.254: U3.3 10.095,8.005 10.6,7.5 15.2,7.5 16.05,6.65 15.9,6.5 20.4,6.5 20.703,6.803 20.703,7.847 21.456,8.6 23.912,8.6 26.112,10.8 27.8,10.8 27.997,10.603 29.859,10.603 29.861,10.6 31.494,10.6 31.994,11.1 31.994,11.706 31.7,12 30.225,12 U6.6 ; P5.15 27.72,23.715 29.282,23.715 30.1,22.897 30.1,17.3 29.6,16.8 28.6,16.8 28.4,16.6 28.4,14.825 U6.3
  Top Layer w0.3: U6.3 28.25,13.95 28.8,13.4 29.6,13.4 30.15,12.85 U6.6
RXD: P5.10 P7.4 | length 39.5
  Top Layer w0.254: v1(14.3,15) 15.2,15 17.564,17.364 17.564,18.264 17.9,18.6 17.9,19.8 v1(18.3,20.2)
  Bottom Layer w0.254: v1(14.3,15) 14.3,14.6 11.1,11.4 11.1,10 9.35,8.25 9.35,5.65 10.6,4.4 13.6,4.4 14.4,3.6 14.4,2.5 14.8,2.1 17.08,2.1 P7.4 ; v1(18.3,20.2) 18.306,20.206 19.206,20.206 ; P5.10 19.8,26.555 19.8,24.2 19.3,23.7 19.3,20.3 19.2,20.2
SCK: P5.23 U7.4 | length 39
  Bottom Layer w0.254: U7.4 16.3,6.6 17.5,5.4 23.2,5.4 23.6,5.8 23.6,9 26.1,11.5 26.1,15 27.568,16.468 27.568,17.042 28.7,18.174 28.7,19.6 27.4,20.9 27.4,22.244 27.853,22.697 28.347,22.697 28.938,22.106 34.706,22.106 35.8,23.2 35.8,24.751 P5.23
SCL: P5.5 P6.2 R21.1 U1.5 U3.16 U4.5 | length 87.3
  Top Layer w0.254: U3.16@7.305,18.7 U3.16 v2(7.555,20.255) 8.45,21.15 ; R21.1 8.45,21.15 ; v1(28.1,22.1) 27.225,22.1 U4.5 27.05,23.35 26.49,23.91 17.79,23.91 17.3,24.4 17.3,26 16.8,26.5 14.9,26.5 13.673,25.273 P5.5 13.427,25.273 12.1,26.6 10.3,26.6 9.7,26 9.7,23.9 8.45,22.65 8.45,21.15 ; v1(36.7,24) 37.456,24 37.556,24.1 53.456,24.1 53.553,24.197 58.803,24.197 v1(58.9,24.1) ; U1.5 60.15,16.85 v1(60.7,17.4)
  Bottom Layer w0.254: P6.2 0.4,16.54 0.4,18.775 0.725,19.1 2.4,19.1 2.9,18.6 6.2,18.6 7.555,19.955 v2(7.555,20.255) ; v1(28.1,22.1) 28.5,21.7 35.1,21.7 36.7,23.3 v1(36.7,24) ; v1(58.9,24.1) 58.9,24 61.097,21.803 61.097,18.153 60.7,17.756 v1(60.7,17.4)
SDA: P5.3 P6.1 R20.1 U1.6 U3.15 U4.4 | length 77.7
  Top Layer w0.254: v1(8.8,17.6) 8.825,17.625 U3.15 8.825,20.025 9.2,20.4 10.95,20.4 R20.1 12.05,21.15 13.1,22.2 13.1,23.6 11.427,25.273 P5.3 ; 12.9,22 18.4,22 19.904,23.504 25.64,23.504 26.397,22.747 26.397,21.403 26.7,21.1 v1(29.5,21.1) ; 28.9,21.1 28.95,21.15 U4.4 ; v1(37.3,23.4) 37.494,23.594 37.624,23.594 37.631,23.6 v1(53.8,23.6) ; U1.6 59.45,17.35 v1(60.5,18.4)
  Bottom Layer w0.254: P6.1 2.28,17.2 8.4,17.2 v1(8.8,17.6) ; v1(29.5,21.1) 29.6,21.2 35.4,21.2 37.3,23.1 v1(37.3,23.4) ; v1(53.8,23.6) 57.8,23.6 60.5,20.9 v1(60.5,18.4)
SPI_CSS: P5.24 U7.5 | length 42.8
  Bottom Layer w0.254: U7.5 14.3,6.855 16.192,4.963 23.337,4.963 24.2,5.825 24.2,9.025 26.7,11.525 26.7,14.8 27.974,16.074 27.974,16.873 29.3,18.199 29.3,19.7 30.3,20.7 35.975,20.7 37.9,22.625 37.9,24.5 37.6,24.8 37.6,26.535 P5.24
TIMER_DONE: P5.13 U8.4 | length 20.1
  Top Layer w0.254: U8.4 22,10.7 v1(22.8,10.7) ; v1(25.3,14.6) 25.506,14.806 25.906,14.806 26.6,15.5 26.6,18.1 v1(26.7,18.2)
  Bottom Layer w0.254: v1(22.8,10.7) 24.725,10.7 25.694,11.668 25.694,14.206 v1(25.3,14.6) ; P5.13 23.622,24.878 24.8,23.7 24.8,21.444 25.097,21.147 25.097,20.303 26.8,18.6 v1@26.8,18.2
TIMER_EN_5V: P5.11 R23.1 U5.3 U5.6 U8.5 | length 38.1
  Top Layer w0.254: v1(16.1,14.2) 16.25,14.05 17.35,14.05 18,13.4 19.9,13.4 20.5,12.8 20.5,12.2 21.1,11.6 U8.5 23.575,11.6 U5.3 24.25,11.75 26.15,13.65 U5.6 ; v1(23.2,17.9) 23.2,18.5 22.7,19 22.7,21.2 24.1,22.6 v1(24.1,22.9)
  Bottom Layer w0.254: v1(16.1,14.2) 16.1,15.8 17.6,17.3 22.9,17.3 23.2,17.6 v1(23.2,17.9) ; P5.11 21.082,23.918 21.3,23.7 21.3,20.5 21.5,20.3 23.1,20.3 23.9,21.1 23.9,22.7 v1(24.1,22.9) v1@24.286,22.9
TXD: P5.8 P7.3 | length 41.4
  Top Layer w0.254: v1(18.4,15.9) 18.4,16.08 18.6,16.28 18.6,18 20.1,19.5 v1(20.1,19.8)
  Bottom Layer w0.254: P5.8 17.3,26.515 17.3,19.8 17.571,19.529 20.094,19.529 20.094,19.794 v1(20.1,19.8) ; v1(18.4,15.9) 18.4,15.623 16.077,13.3 13.632,13.3 11.6,11.268 11.6,9.2 11.2,8.8 11.2,5.8 12.194,4.806 13.768,4.806 14.175,4.4 18.6,4.4 19.8,3.2 P7.3
VBAT: C6.2 C7.2 C8.2 D4.1 F1.1 J2.2 J3.2 P2.1 R10.1 R17.2 R22.2 R23.2 R25.2 R26.2 T2.1 U1.13 U1.14 U2.12 U2.13 U5.2 U6.2 U8.1 | length 122.9
  Top Layer w0.254: R22.2@7.9,5.45 7.65,5.7 9.5,5.7 J3.2@9.7,5.9 ; 16.3,14.9 16.3,15.3 18.1,17.1 18.1,18.144 19.3,19.344 19.3,20.2 19.6,20.5 20.75,20.5 R23.2 ; U5.2 24.4,12.7 25.583,13.883 25.583,14.003 25.98,14.4 v1(27.4,14.4) 27.4,15.65 R26.2@27.8,16.05 ; v1(26.9,10.1) 27,10.1 v1@27.1,10.2 ; U6.2 29.2,14 29.304,13.896 30.604,13.896 32.4,12.1 32.4,10.5 v1(32,10.1) 32,10.047 v1@32.047,10 ; R10.1 46.3,17.6 v1(46.5,17.8)
  Top Layer w0.3: J3.2@9.7,5.9 10.5,5.1 11.5,5.1 12,5.6 12,6.8 12.2,7 13.3,7 13.7,6.6 R25.2 15.45,5.6 18.8,5.6 19.28,5.12 22.98,5.12 23.7,4.4 26.219,4.4 26.688,4.869 26.688,7.012 26.432,7.268 25.741,7.268 24.282,7.268 R17.2 ; U8.1 16.15,12.55 15.3,13.4 15.3,14.3 15.9,14.9 16.3,14.9 16.6,14.9 17,14.5 J2.2 18.5,14.523 19.229,15.252 20.425,15.252 20.898,14.78 20.898,13.925 21.522,13.3 22.698,13.3 23,12.998 23.427,12.998 U5.2
  Top Layer w0.4: T2.1@25.741,6.568 25.741,7.268 25.741,7.838 25.741,9.108 25.741,9.541 26.4,10.2 v1@27.1,10.2 ; v1@27,10.1 v1(32,10.1)
  Top Layer w0.8: 36.1,7.4 D4.1 ; C6.2 39.15,13.75 39.964,14.564
  Bottom Layer w0.254: v1(26.9,10.1) 26.9,10.7 27.4,11.2 v1(27.4,14.4)
  Bottom Layer w0.8: v1@32,10.123 32.223,9.9 36.2,9.9 37.8,8.3 F1.1 ; 36,7.4 36.1,7.5 F1.1 ; 36.275,9.825 38.45,12 42.1,12 43.9,13.8 43.9,17.45 44.25,17.8 52.9,17.8 53.6,18.5 ; P2.1 38.54,6.76 F1.1
  other v2: 35.9,6.7 35.9,7.8 53.825,17.9 54.6,17.9 54.175,18.675
VBUS: CON1.1 D5.1 D6.1 R1.1 R4.2 R24.2 U1.1 U1.24 | length 69.3
  Top Layer w0.254: R24.2 32.2,20.4 31.5,19.7 31.5,14.4 32.9,13 32.9,6.7 34.2,5.4 41.9,5.4 42.1,5.6 42.1,8.4 41.8,8.7 41.8,11.7 42.3,12.2 43.822,12.2 R4.2
  Top Layer w0.3: R4.2 44.35,11.925 44.825,12.4 50.5,12.4 55.7,7.2 55.7,5.725 ; 60.1,13.1 60.8,13.8 62.5,13.8 63.3,13 63.3,12.584 R1.1@63.133,12.417
  Top Layer w0.8: D5.1 53.6,5.725 55.7,5.725 56.398,5.725 56.773,6.1 56.773,7.623 D6.1 58.473,7.8 60.1,9.427 60.1,13.1 59,14.2
pads on no net: CON1.2 CON1.3 CON1.4 P5.17 P5.18 P5.26 P5.27 P5.28 P5.32 P5.35 P5.36 P5.37 P5.38 P5.40 T2. U1.3 U1.7 U1.12 U2.2 U2.6 U3.5 U3.6 U3.7 U3.8 U3.9 U3.10 U3.11 U3.12 U7.7 U7.11 U7.12 U7.14 U7.15 U7.16

## Keep-outs
Top Layer:
  lines w0.1: 62,0 ccw(c62,3) 65,3
Keep-Out Layer:
  lines w0.1: 0,3 ccw(c3,3) 3,0 ; 0,3 ccw(c3,3) 3,0 ; 0,3 0,27 ; 0,3 0,27 ; 0,27 cw(c3,27) 3,30 ; 0,27 cw(c3,27) 3,30 ; 3,0 62,0 ; 3,0 62,0 ; 3,30 62,30 ; 3,30 62,30 ; 62,0 ccw(c62,3) 65,3 ; 62,30 cw(c62,27) 65,27 ; 62,30 cw(c62,27) 65,27 ; 65,3 65,27 ; 65,3 65,27

## Other copper
Top Layer:
  rectangle net VBAT: 39.6,14.5 40.3,15.6
  rectangle net GND: 36.2,15.3 37.6,18.8
  rectangle net NetL2_2: 32.1,17.4 34.1,18.1
  rectangle net NetL2_1: 32.1,16 34.1,16.6
  rectangle net GND: 50.8,15.1 52.125,15.9
  rectangle net VBUS: 52.219,3.556 52.6,6.4
  rectangle net VBAT: 35.3,6.2 36.6,8.2
  region net +5V: 37.5,19.9 37.5,20.4 38.4,21.3 38.4,22.7 38.3,22.8 35.7,22.8 35.6,22.7 35.6,21.3 36.4,20.442 36.4,19.9
  region net VBAT: 37.2,9.4 38.2,10.4 38.2,12.543 37.533,13.4 36.4,13.4 35.6,12.6 35.6,11
  region net GND: 53.9,15.4 53.975,15.475 55.875,15.475 55.875,14.9 55.75,14.9 55.55,14.7 54.05,14.7
  region net VBAT: 55.475,17.435 54.4,18.785 54.4,18.9 54.15,19.15 53.258,19.15 53.067,18.935 53.067,18.43 54.181,16.75 55.475,16.75
  region net NetC3_1: 56.3,14.425 56.3,13.7 55.3,12.7 54.5,12.7 50.925,12.7 50.625,13 48.25,13 48.25,14.55 48.3,14.6 50.75,14.6 51.85,13.5 54.525,13.5 55.475,14.45 56.15,14.45
  region net NetC4_1: 55.5,16.475 55.5,15.725 53.25,15.725 52.725,16.475 48.3,16.475 48.063,16.712 48.086,20 51.675,20 54,16.475
  region net VBUS: 58.6,14.95 58.6,14.7 58.4,14.5 58.15,14.5 58.15,13.725 58.35,13.525 59.325,13.525 59.725,13.925 59.725,14.725 59.5,14.95
Bottom Layer:
  rectangle net GND: 55.685,14.4 58.5,17.762
  rectangle net NetL2_1: 32.1,15.9 40.5,16.7
  rectangle net NetL2_2: 32.1,17.3 40.5,18
  rectangle net GND: 50.875,15.1 52.4,15.9
  rectangle net VBAT: 53.1,17.4 55.1,19.075
  rectangle net VBAT: 35.3,5.8 36.6,8.2

## Silkscreen, mask and mechanical layers (free items; w line width, h text height)
Top Overlay:
  text "SDA" at 3.8,16.9 h0.8 r90
  text "SCL" at 3.8,14.3 h0.8 r90
  text "CHG" at 61.3,13.35 h0.8
  text "GND" at 3.8,11.6 h0.8 r90
  text "3V3" at 3.8,9.1 h0.8 r90
  text "SOLAR" at 43.1,4.975 h0.8
  text "BAT" at 35.825,4.725 h0.8
  text "IO6" at 6.9,0.6 h0.8
  text "IO5" at 9.525,0.6 h0.8
  text "5V" at 12.5,0.6 h0.8
  text "GND" at 14.675,0.6 h0.8
  text "RX" at 17.7,0.6 h0.8
  text "TX" at 20.125,0.6 h0.8
  text "3V3" at 22.075,0.6 h0.8
  text "OUT" at 24.675,0.6 h0.8
  text "3V3" at 27.15,0.6 h0.8
  text "IO25" at 29.725,0.6 h0.8
  text "GND" at 33.175,0.6 h0.8
  text "+" at 46.3,0.4 h0.8
  text "+" at 36.925,0.35 h0.8
  text "-" at 43.325,0.35 h0.8
  text "-" at 39.4,0.325 h0.8
Bottom Overlay:
  rectangle: 43.4,8.375 53.9,11.825
  lines w0.3: 4.375,11.075 5.825,11.075 ; 4.5,18.175 5.85,18.175 ; 5.075,10.2 5.075,11.825
  text "PiRA Zero" at 59.025,20.2 h3
  text "TER" at 64.4,16.5 h1
  text "irnas.eu" at 58.975,15.825 h3
  text "v0.2" at 58.925,12.475 h2
  text "No." at 59,8.525 h2
  text "CERN OHL" at 57.475,5.625 h1.5
Mechanical 13:
  circle w0.05: c51.693,3.719 r0.35
  circle w0.05: c55.743,3.719 r0.35
  lines w0.1: 0,3 ccw(c3,3) 3,0 62,0 ccw(c62,3) 65,3 65,27 ccw(c62,27) 62,30 3,30 ccw(c3,27) 0,27 0,3
  lines w0.2: 22.6,20.5 24.2,20.5 24.2,23.3 22.6,23.3 ; 22.6,20.5 22.6,23.3 ; 22.6,20.5 21,20.5 21,23.3 22.6,23.3 ; 22.6,20.5 22.6,23.3 ; 21.3,8.4 21.3,11.2 22.9,11.2 22.9,8.4 21.3,8.4 ; 35.4,12.5 38.2,12.5 38.2,14.1 35.4,14.1 35.4,12.5
  text "R32" at 21.1,19.9 h1 r270
  text "R33" at 23,19.9 h1 r270
  text "R34" at 39,12.8 h1
  text "BOTTOM" at 34.2,10.8 h1
  text "R11" at 23.5,9.3 h1
ASM TOP:
  lines w0.1: 65,27 ccw(c62,27) 62,30 3,30 ccw(c3,27) 0,27 0,3 ccw(c3,3) 3,0 62,0 ccw(c62,3) 65,3 65,27.1
  text "Assembly Drawing TOP" at 5,32.6 h3
ASM BOT:
  lines w0.1: 65,27 ccw(c62,27) 62,30 3,30 ccw(c3,27) 0,27 0,3 ccw(c3,3) 3,0 62,0 ccw(c62,3) 65,3 65,27.1
  text "Assembly Drawing BOTTOM" at 65.6,32.8 h3

## Dimensions
0,30 to 65,30 on Mechanical 1
0,30 to 0,0 on Mechanical 1